# Altium PCB PCB2.PcbDoc
Units mm, origin at the board's own origin, x right, y up, seen from the top; angles counter-clockwise.
Board outline 43 x 43 mm, 2 copper layers (Top Layer, Bottom Layer); 16 components, 10 nets, 36 pads, 0 vias.
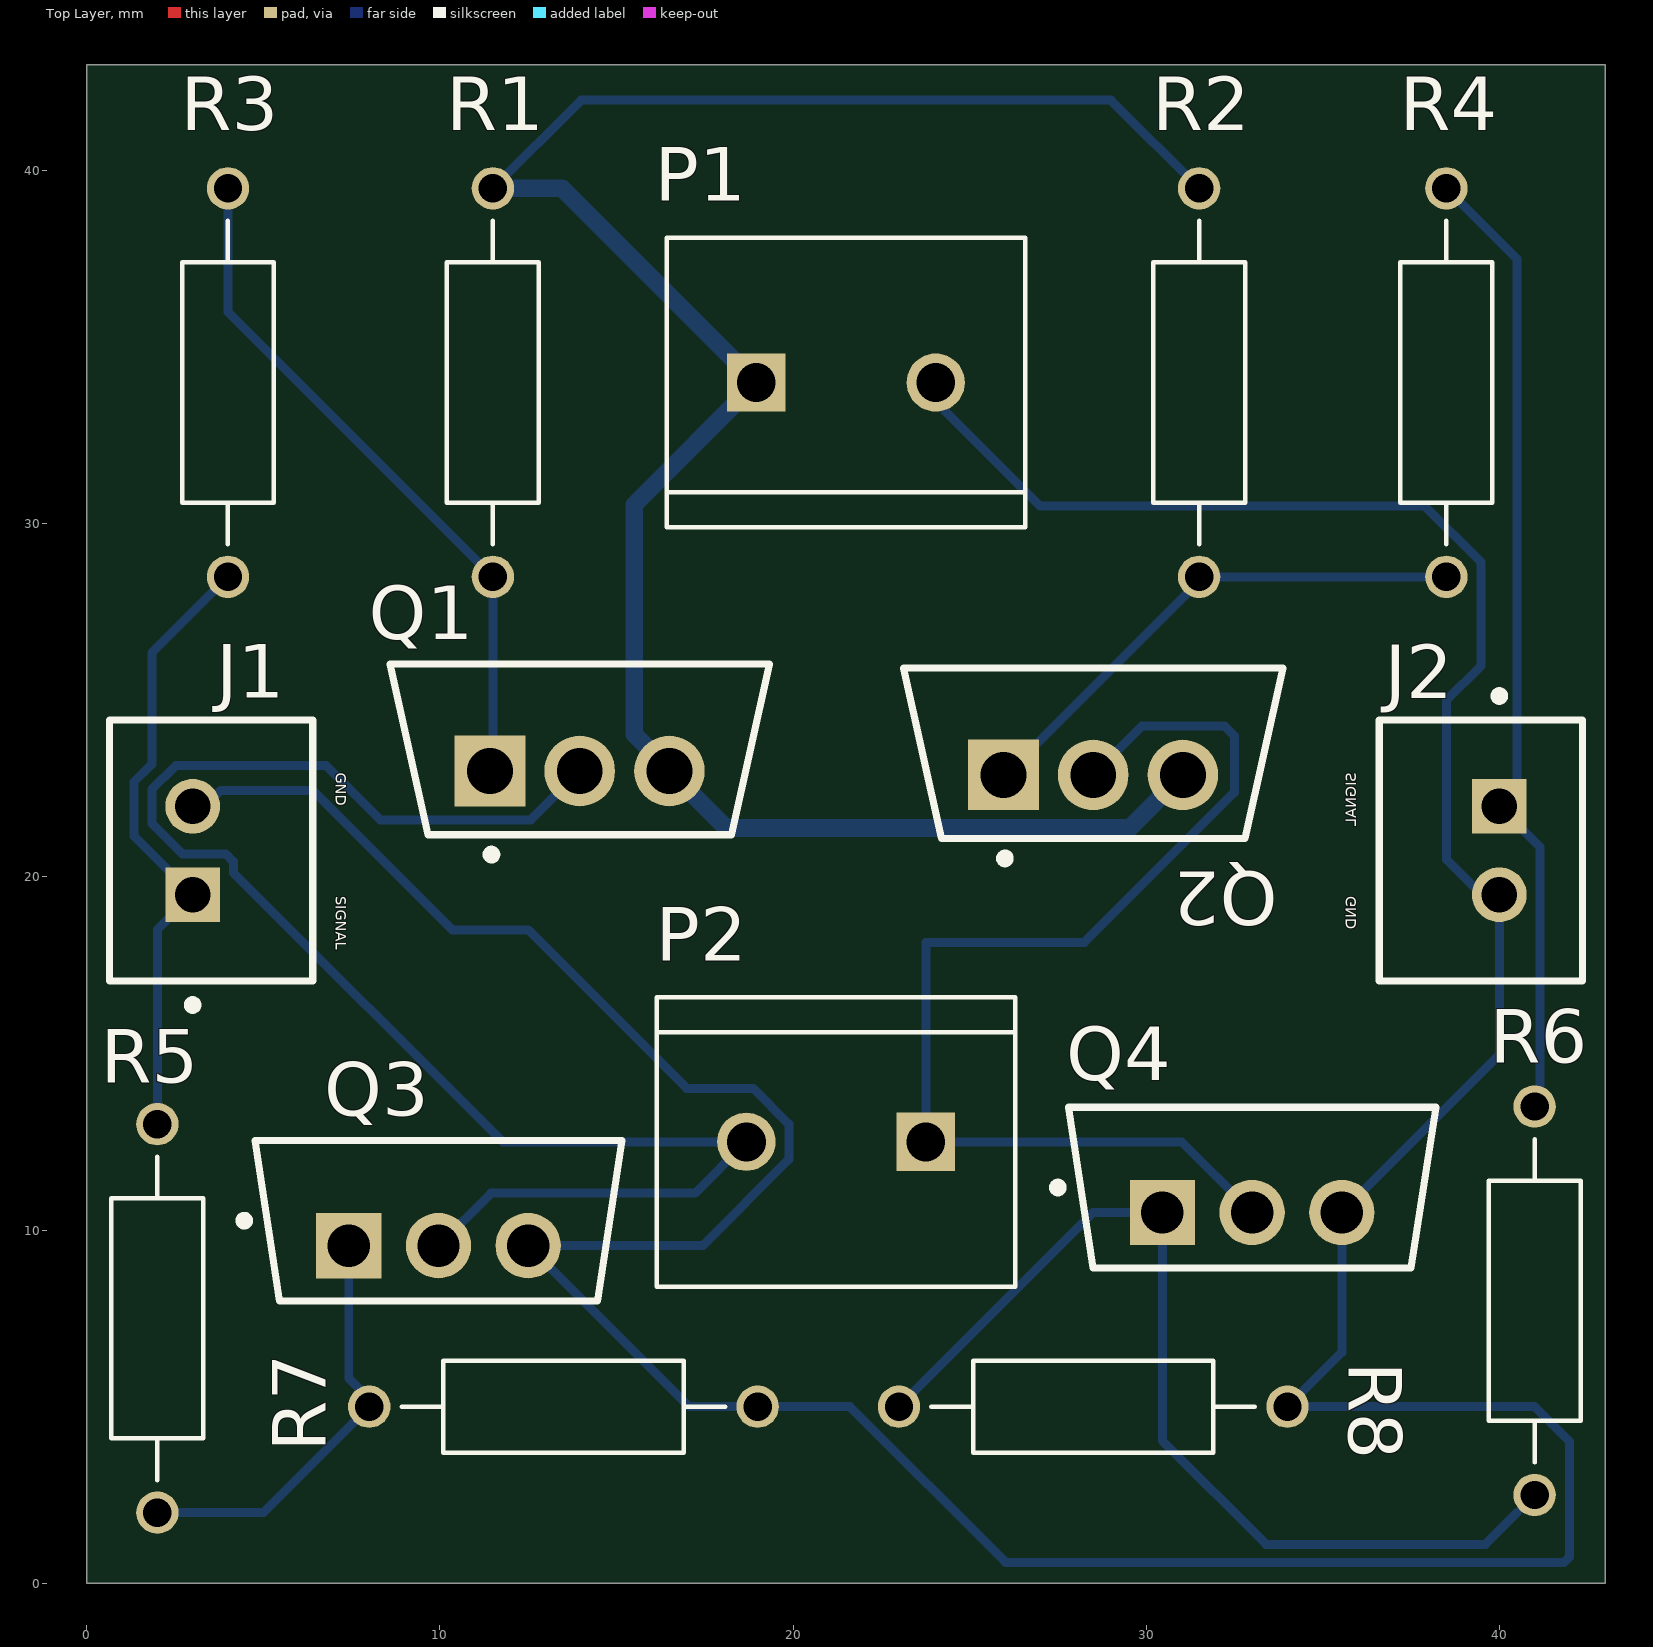
[diagram p0: Top Layer view]
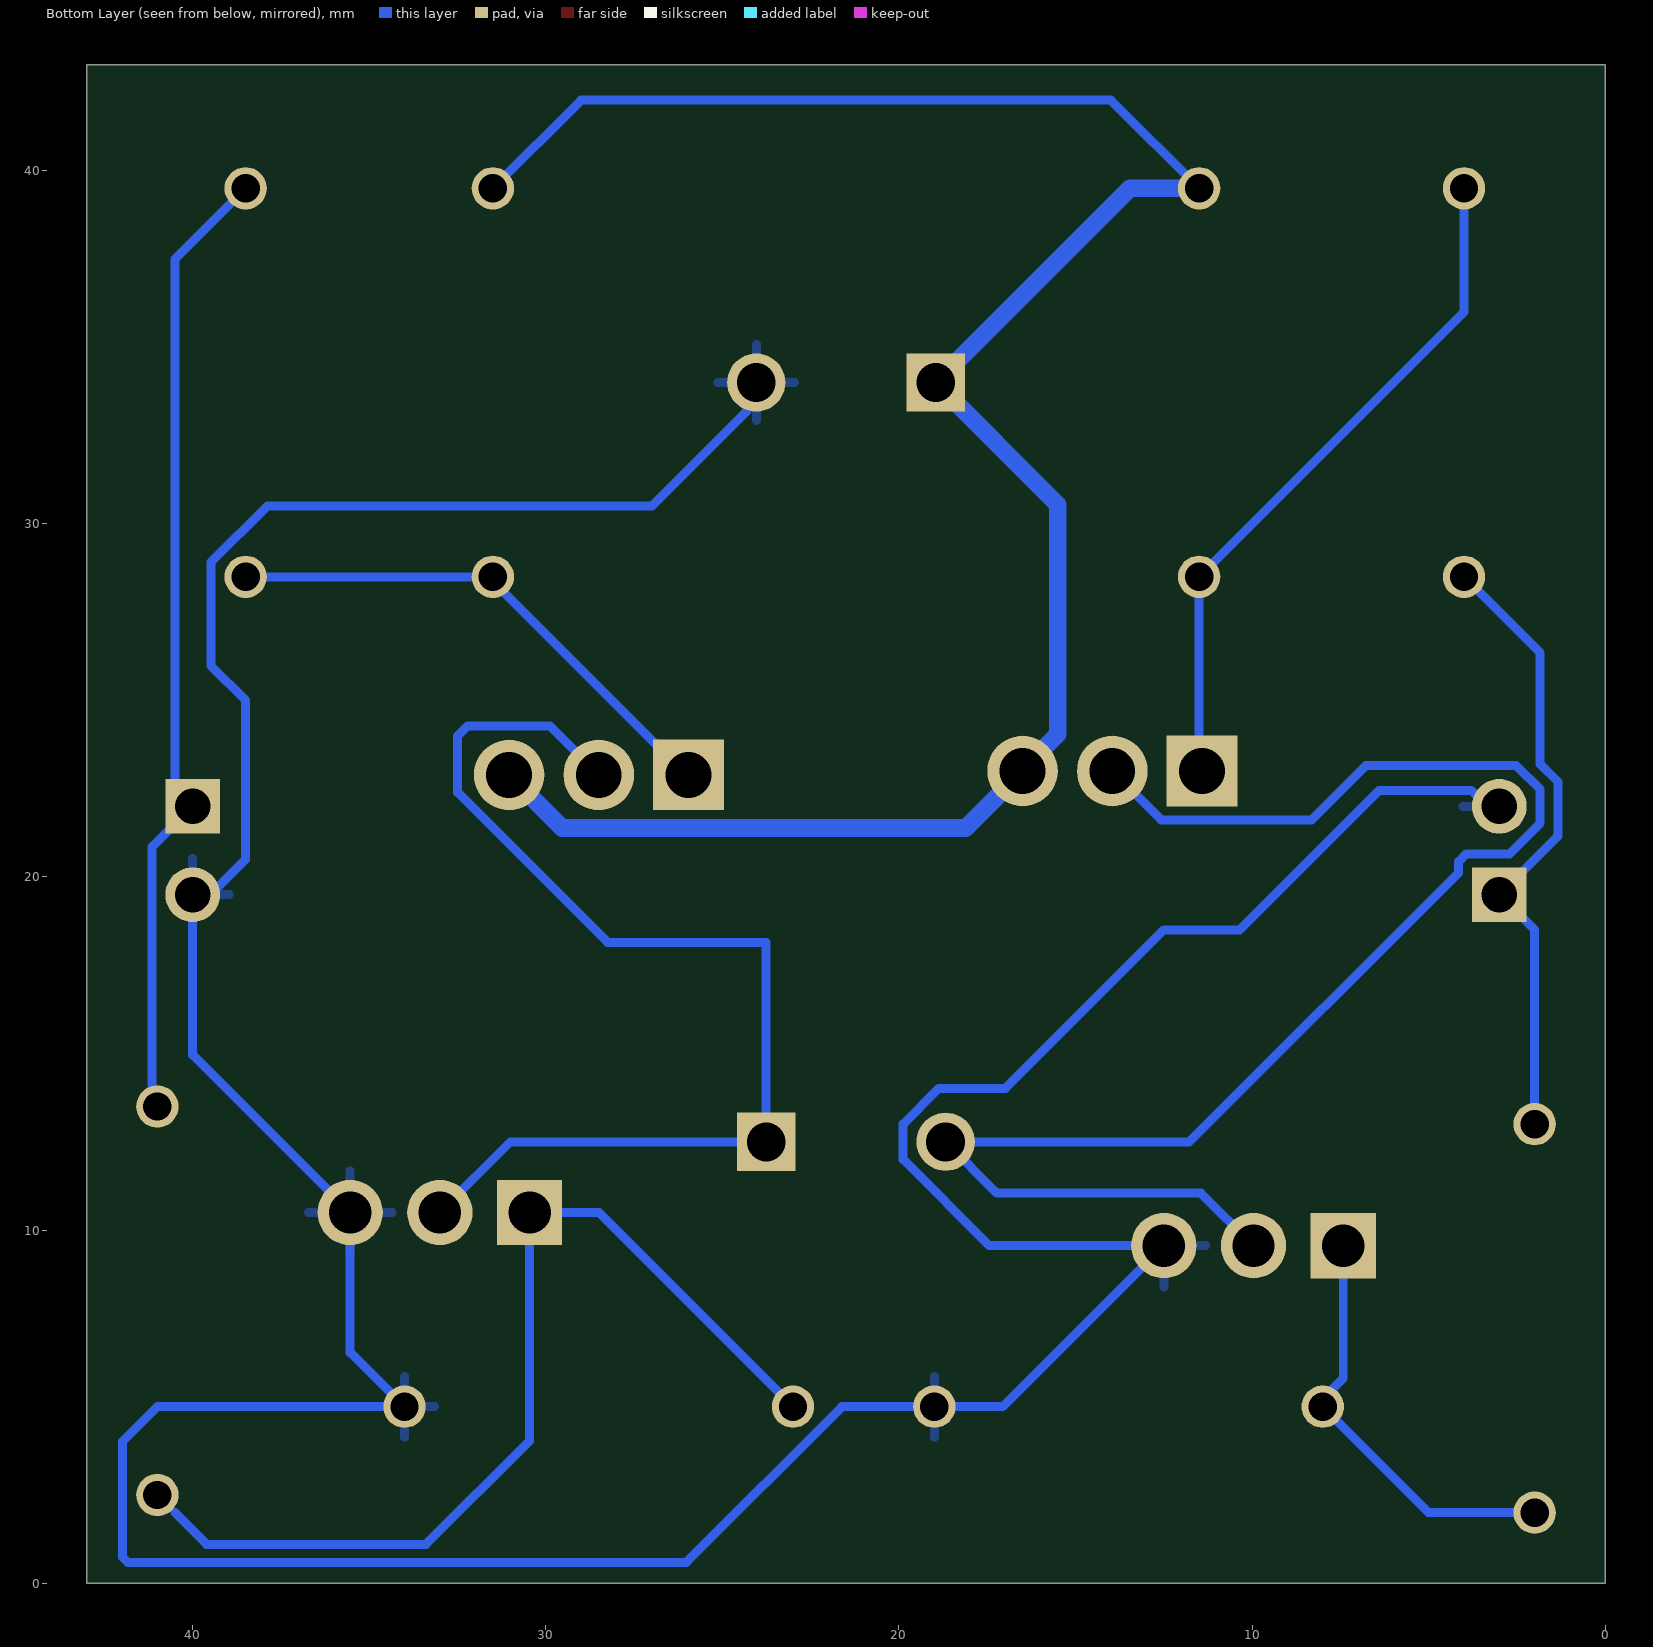
[diagram p1: Bottom Layer view, seen from below]
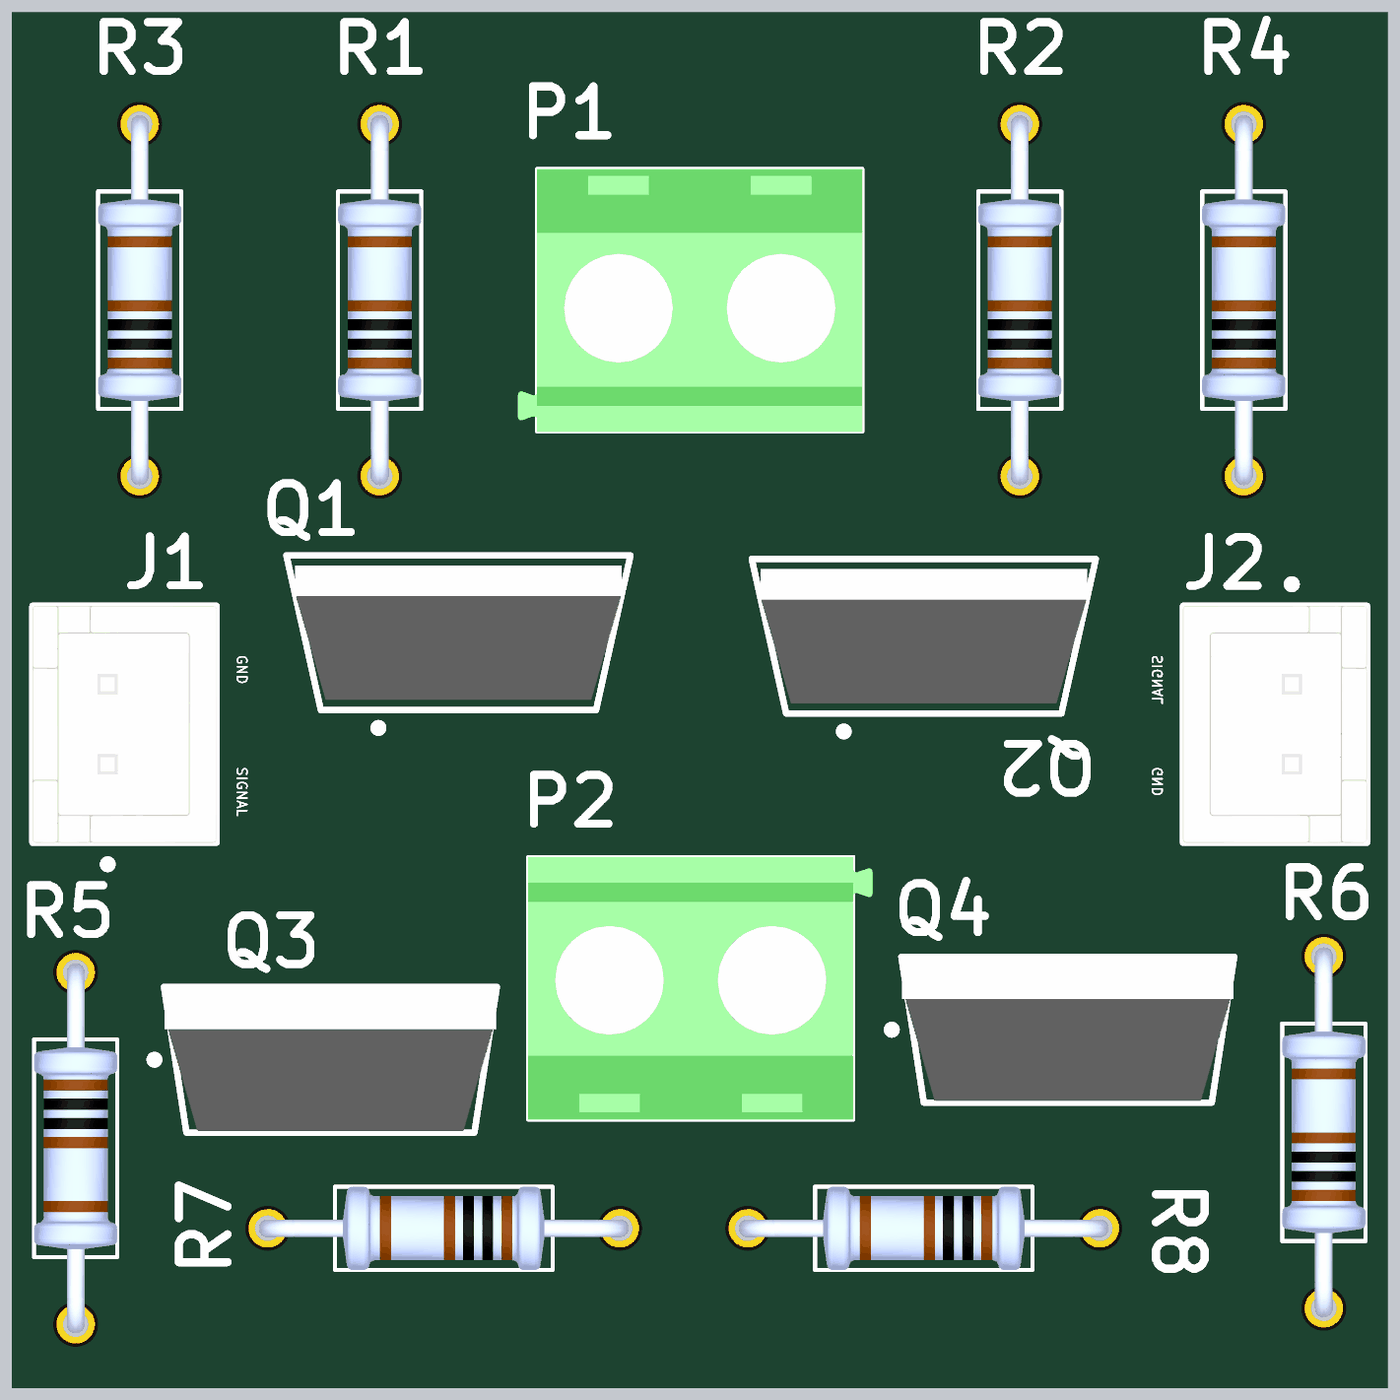
[diagram p2: 3D render of the assembled board from above, using the file's embedded part models]

## Layer stack, top to bottom
Top Solder: solder mask 0.0102, Solder Resist, Dk 3.5
Top Layer: signal copper 0.0356
Dielectric 1: dielectric 0.32, FR-4, Dk 4.8
Bottom Layer: signal copper 0.0356
Bottom Solder: solder mask 0.0102, Solder Resist, Dk 3.5

## Board outline
0,0 0,43 43,43 43,0

## Design rules (kind name [scope] priority, off if disabled: settings)
Clearance [All] p1: gap=0.254 ignorepadtopadclearanceinfootprint=FALSE
PolygonConnect [All] p1: connectstyle=Relief reliefconductorwidth=0.254 reliefentries=4 polygonreliefangle="90 Angle" airgapwidth=0.254
RoutingVias [All] p1: holewidth=0.711 width=1.27 viastyle="Through Hole" minholewidth=0.711 minwidth=1.27 maxholewidth=0.711 maxwidth=1.27
SolderMaskExpansion [All] p1: expansion=0.102 istentingtop=FALSE
SupplyNets "Schematic Supply Nets_1" [InNet('+12')] p1: voltage=0.000
SupplyNets "Schematic Supply Nets" [InNet('GND')] p2: voltage=0.000
Width [All] p1: maxlimit=0.5 minlimit=0.254 preferedwidth=0.254
30 further rules are at their usual default settings.

## Components (designator, comment, footprint, x,y, rotation, side; value= is the part's Value field where it differs from the comment)
J1 "B2B-XH-A(LF)(SN)" FP-B2B-XH-A_LF_SN-MFG 3.525,20.75 r90 top
J2 "B2B-XH-A(LF)(SN)" FP-B2B-XH-A_LF_SN-MFG 39.475,20.75 r270 top
P1 "282837-2" TE_282837-2 21.5,34 r0 top
P2 "282837-2" TE_282837-2 21.219,12.5 r180 top
Q1 "IRF4905PBF" FP-PG-TO220-3-MFG#1 13.96,23.61 r90 top
Q2 "IRF4905PBF" FP-PG-TO220-3-MFG#1 28.5,23.5 r90 top
Q3 "IRLZ44NPbF" FP-PG-TO220-3-MFG#2 9.96,10.266 r90 top
Q4 "IRLZ44NPbF" FP-PG-TO220-3-MFG#2 33,11.205 r90 top
R1 "MFR-25FBF52-10KOhms" RESAD1100W55L680D260 11.5,34 r90 top
R2 "MFR-25FBF52-10KOhms" RESAD1100W55L680D260 31.5,34 r90 top
R3 "MFR-25FBF52-500Ohms" RESAD1100W55L680D260 4,34 r90 top
R4 "MFR-25FBF52-500Ohms" RESAD1100W55L680D260 38.5,34 r90 top
R5 "MFR-25FBF52-500Ohms" RESAD1100W55L680D260 2,7.5 r270 top
R6 "MFR-25FBF52-500Ohms" RESAD1100W55L680D260 41,8 r90 top
R7 "MFR-25FBF52-10KOhms" RESAD1100W55L680D260 13.5,5 r180 top
R8 "MFR-25FBF52-10KOhms" RESAD1100W55L680D260 28.5,5 r180 top

## Footprints (in the part's own frame and the unit in brackets; to place one, negate y for a bottom-side part, rotate by r counter-clockwise, add the part's x,y. Pads: shape width x height; smd on the part's side, far side on the other; paste and mask are expansions set on the pad)
FP-B2B-XH-A_LF_SN-MFG [mm]
  rect 1.55x1.55 hole 1 paste-2539.97 mask+0: 1(-1.25,0.525)
  round 1.55 hole 1 paste-2539.97 mask+0: 2(1.25,0.525)
  silkscreen extent -4.5,-2.88 3.7,2.88, body extent -3.8,-2.98 3.8,2.98, height 0.25
FP-PG-TO220-3-MFG#1 [mm]
  rect 2x2 hole 1.3 paste-2539.97 mask+0: 1(-0.61,2.54)
  round 2 hole 1.3 paste-2539.97 mask+0: 2(-0.61,0) 3(-0.61,-2.54)
  silkscreen extent -3.1,-5.38 2.41,5.38, body extent -2.51,-5.48 2.51,5.48, height 0.25
FP-PG-TO220-3-MFG#2 [mm]
  rect 1.85x1.85 hole 1.2 paste-2539.97 mask+0: 1(-0.705,2.54)
  round 1.85 hole 1.2 paste-2539.97 mask+0: 2(-0.705,0) 3(-0.705,-2.54)
  silkscreen extent -2.27,-5.2 2.27,5.62, body extent -2.37,-5.55 2.37,5.55, height 0.25
RESAD1100W55L680D260 [mm]
  round 1.2 hole 0.8: 1(-5.5,0) 2(5.5,0)
  silkscreen extent -4.58,-1.3 4.58,1.3, body extent -5.77,-1.3 5.77,1.3, height 2.6
TE_282837-2 [mm]
  rect 1.65x1.65 / inner round 1.65 / far side rect 1.65x1.65 hole 1.1: 1(-2.54,0)
  round 1.65 hole 1.1: 2(2.54,0)
  silkscreen extent -5.08,-4.1 5.08,4.1, body extent -5.68,-4.1 5.08,4.1, height 10

## Part data
J1 J2: library part CMP-2000-05888-3, "CONN HEADER VERT 2POS 2.5MM", Color=Natural, Contact Resistance=20mR, Current Rating=3A, Housing Color=White, Insulation Resistance=1GR, Max Operating Temperature=85°C, Max Voltage Rating (AC)=250V, Min Operating Temperature=-25°C, Connector Type="Male Pin", Contact Material=Brass, Contact Plating=Tin, Contact Type="Male Pin", Depth=5.75mm, Fastening Type=Detent, Housing Material=Polyamide, Lead Free="Lead Free", Lead Pitch=2.5mm, Length=7.4mm, Max Current Rating=3A, Max Voltage Rating (DC)=250V, Mount="Through Hole", Number of Contacts=2, Number of Positions=2, Number of Rows=1, Orientation=Straight, Packaging=Bulk, Pitch=2.5mm, REACH SVHC="No SVHC", Series=XH, Termination=Solder, Voltage Rating=250V, Voltage Rating (AC)=250V, Wire/Cable Gauge=22AWG
P1 P2: "Ð Ð°Ð·ÑŠÐµÐ¼Ð½Ñ‹Ðµ ÐºÐ»ÐµÐ¼Ð¼Ð½Ñ‹Ðµ ÐºÐ¾Ð»Ð¾Ð´ÐºÐ¸ Ð Ð¾Ð·ÐµÑ‚ÐºÐ° 2 Ð¿Ð¾Ð»Ð¾Ð¶ÐµÐ½Ð¸Ñ 5,08 Ð¼Ð¼ ÐŸÑ€Ð¸Ð¿Ð¾Ð¹ Ð¿Ñ€ÑÐ¼Ð¾Ð¹ Ñ‡ÐµÑ€ÐµÐ· Ð¾Ñ‚Ð²ÐµÑ€ÑÑ‚Ð¸Ðµ 13,5 Ð / ÐºÐ¾Ð½Ñ‚Ð°ÐºÑ‚", Package=None, Availability="In Stock", Check_prices=https://www.snapeda.com/parts/282837-2/TE+Connectivity+AMP+Connectors/view-part/?ref=eda, MF="TE Connectivity", MP=282837-2, Price=None, Purchase-URL=https://pricing.snapeda.com/search/part/282837-2/?ref=eda, SnapEDA_Link=https://www.snapeda.com/parts/282837-2/TE+Connectivity+AMP+Connectors/view-part/?ref=snap
Q1 Q2: library part CMP-32901-000200-1, "MOSFET P-CH 55V 74A TO-220AB", Case/Package=TO-220, Continuous Drain Current (ID)=74A, Drain to Source Breakdown Voltage=-55V, Drain to Source Resistance=20mR, Gate to Source Voltage (Vgs)=20V, Input Capacitance=3.4nF, Max Operating Temperature=175°C, Max Power Dissipation=200W, Min Operating Temperature=-55°C, Threshold Voltage=-4V, Drain to Source Voltage (Vdss)=-55V, Element Configuration=Single, Halogen Free="Halogen Free", Height=0.6inch, Lead Free="Lead Free", Length=0.414inch, Max Dual Supply Voltage=-55V, Mount="Through Hole", Number of Pins=3, Packaging=Rail/Tube, Power Dissipation=200W, Rds On Max=20mR, REACH SVHC="No SVHC", RoHS Compliant=Yes, Turn-Off Delay Time=61ns, Turn-On Delay Time=18ns, Width=0.185inch
Q3 Q4: library part CMP-32901-000488-1, "MOSFET N-CH 55V 47A TO220AB", Case/Package=TO-220, Continuous Drain Current (ID)=47A, Drain to Source Breakdown Voltage=55V, Drain to Source Resistance=35mR, Gate to Source Voltage (Vgs)=16V, Input Capacitance=1.7nF, Max Operating Temperature=175°C, Max Power Dissipation=110W, Min Operating Temperature=-55°C, Threshold Voltage=2V, Drain to Source Voltage (Vdss)=55V, Element Configuration=Single, Halogen Free="Halogen Free", Height=0.6inch, Lead Free="Lead Free", Length=0.414inch, Max Dual Supply Voltage=55V, Mount="Through Hole", Number of Pins=3, Packaging=Rail/Tube, Power Dissipation=110W, Rds On Max=22mR, REACH SVHC="No SVHC", RoHS Compliant=Yes, Turn-Off Delay Time=26ns, Turn-On Delay Time=11ns, Width=0.185inch
R1 R2 R3 R4 R5 R6 R7 R8: library part MFR-25FBF52-10K, "10.2 kOhms Â±1% 0.25W, 1/4W Through Hole Resistor Axial - Metal Film", Package="Axial Yageo", Availability="In Stock", Check_prices=https://www.snapeda.com/parts/MFR-25FBF52-10K/Yageo/view-part/?ref=eda, MF=Yageo, MP=MFR-25FBF52-10K, Price=None, Purchase-URL=https://pricing.snapeda.com/search/part/MFR-25FBF52-10K/?ref=eda, SnapEDA_Link=https://www.snapeda.com/parts/MFR-25FBF52-10K/Yageo/view-part/?ref=snap

## Nets (pads, with @x,y where several pads share a name; then routed paths per layer and width w, separated by ;. In a path a pad name is that pad's centre, name@x,y a point inside that pad or via, vN(x,y) a via of type N, cw(c..) or ccw(c..) an arc to the next point about the centre after c; other vN are vias at no path point)
+12: P1.1 Q1.3 Q2.3 R1.2 R2.2 | length 60.5
  Bottom Layer w0.254: R1.2 14,42 29,42 R2.2
  Bottom Layer w0.5: R1.2 13.46,39.5 P1.1 15.5,30.54 15.5,24.043 16.5,23.043 Q1.3 18.114,21.386 29.536,21.386 Q2.3
GND: J1.2 J2.2 P1.2 Q3.3 Q4.3 R7.1 R8.1 | length 120.9
  Bottom Layer w0.254: J1.2 3.346,22 3.797,22.45 6.401,22.45 10.351,18.5 12.5,18.5 16.989,14.011 18.874,14.011 19.885,13 19.885,12 17.446,9.561 Q3.3 17.061,5 R7.1 21.613,5 26.019,0.594 41.832,0.594 41.981,0.742 41.981,4.019 41,5 R8.1 35.54,6.54 Q4.3 40,14.96 J2.2 39.752,19.748 39.252,19.748 38.5,20.5 38.5,25 39.481,25.981 39.481,28.906 37.887,30.5 27,30.5 24.307,33.193 24.307,33.733 P1.2
MCU1: J1.1 R3.1 R5.1 | length 17.7
  Bottom Layer w0.254: 2,18.5 J1.1 1.336,21.164 1.336,22.689 1.844,23.197 1.844,26.344 R3.1
  Bottom Layer w0.26: R5.1@2,12.989 2,18.5
MCU2: J2.1 R4.2 R6.2 | length 27.6
  Bottom Layer w0.254: R4.2 40.5,37.5 40.5,22.5 J2.1 41.156,20.844 41.156,13.656 R6.2
NetP2_1: P2.1 Q2.2 Q4.2 | length 32.5
  Bottom Layer w0.254: Q2.2 29.881,24.271 32.221,24.271 32.5,23.992 32.5,22.397 28.252,18.149 23.759,18.149 P2.1 31,12.5 Q4.2
NetP2_2: P2.2 Q1.2 Q3.2 | length 45.3
  Bottom Layer w0.254: Q3.2 11.448,11.05 17.229,11.05 P2.2 11.782,12.5 4.156,20.126 4.156,20.433 3.933,20.656 3.626,20.656 2.709,20.656 1.844,21.521 1.844,22.479 2.521,23.156 6.781,23.156 8.318,21.619 12.579,21.619 Q1.2
NetQ1_1: Q1.1 R1.1 R3.2 | length 19.6
  Bottom Layer w0.254: R3.2 4,36 R1.1 11.5,23.08 Q1.1
NetQ2_1: Q2.1 R2.1 R4.1 | length 15
  Bottom Layer w0.254: Q2.1@25.96,22.838 Q2.1 26.833,23.763 26.885,23.763 31.5,28.378 R2.1 R4.1
NetQ3_1: Q3.1 R5.2 R7.2 | length 12.4
  Bottom Layer w0.254: R5.2@1.673,2 5,2 R7.2 8,5.227 7.42,5.807 Q3.1
NetQ4_1: Q4.1 R6.1 R8.2 | length 27.8
  Bottom Layer w0.254: R8.2 28.5,10.5 Q4.1 30.46,4.04 33.398,1.102 39.602,1.102 40.5,2

## Polygon pours and split planes (outlines as drawn)
GND on Bottom Layer "GND_L02_P001" (none, remove dead copper, pour order 1): 0,43 43,43 43,0 0,0

## Silkscreen, mask and mechanical layers (free items; w line width, h text height)
Top Overlay:
  text "GND" at 7.05,22.95 h0.3 r270
  text "SIGNAL" at 35.95,22.95 h0.3 r90
  text "SIGNAL" at 7.05,19.45 h0.3 r270
  text "GND" at 35.95,19.45 h0.3 r90